# Altium PCB Luchador R3.0 32CH BB.PcbDoc
Units mil, origin at the board's own origin, x right, y up, seen from the top; angles counter-clockwise.
Board outline 3681 x 2951 mil, 4 copper layers (Top Layer, GND PLANE, Signal Layer 1, Bottom Layer), stack 61.634 mil thick; 35 components, 55 nets, 110 pads, 33 vias.
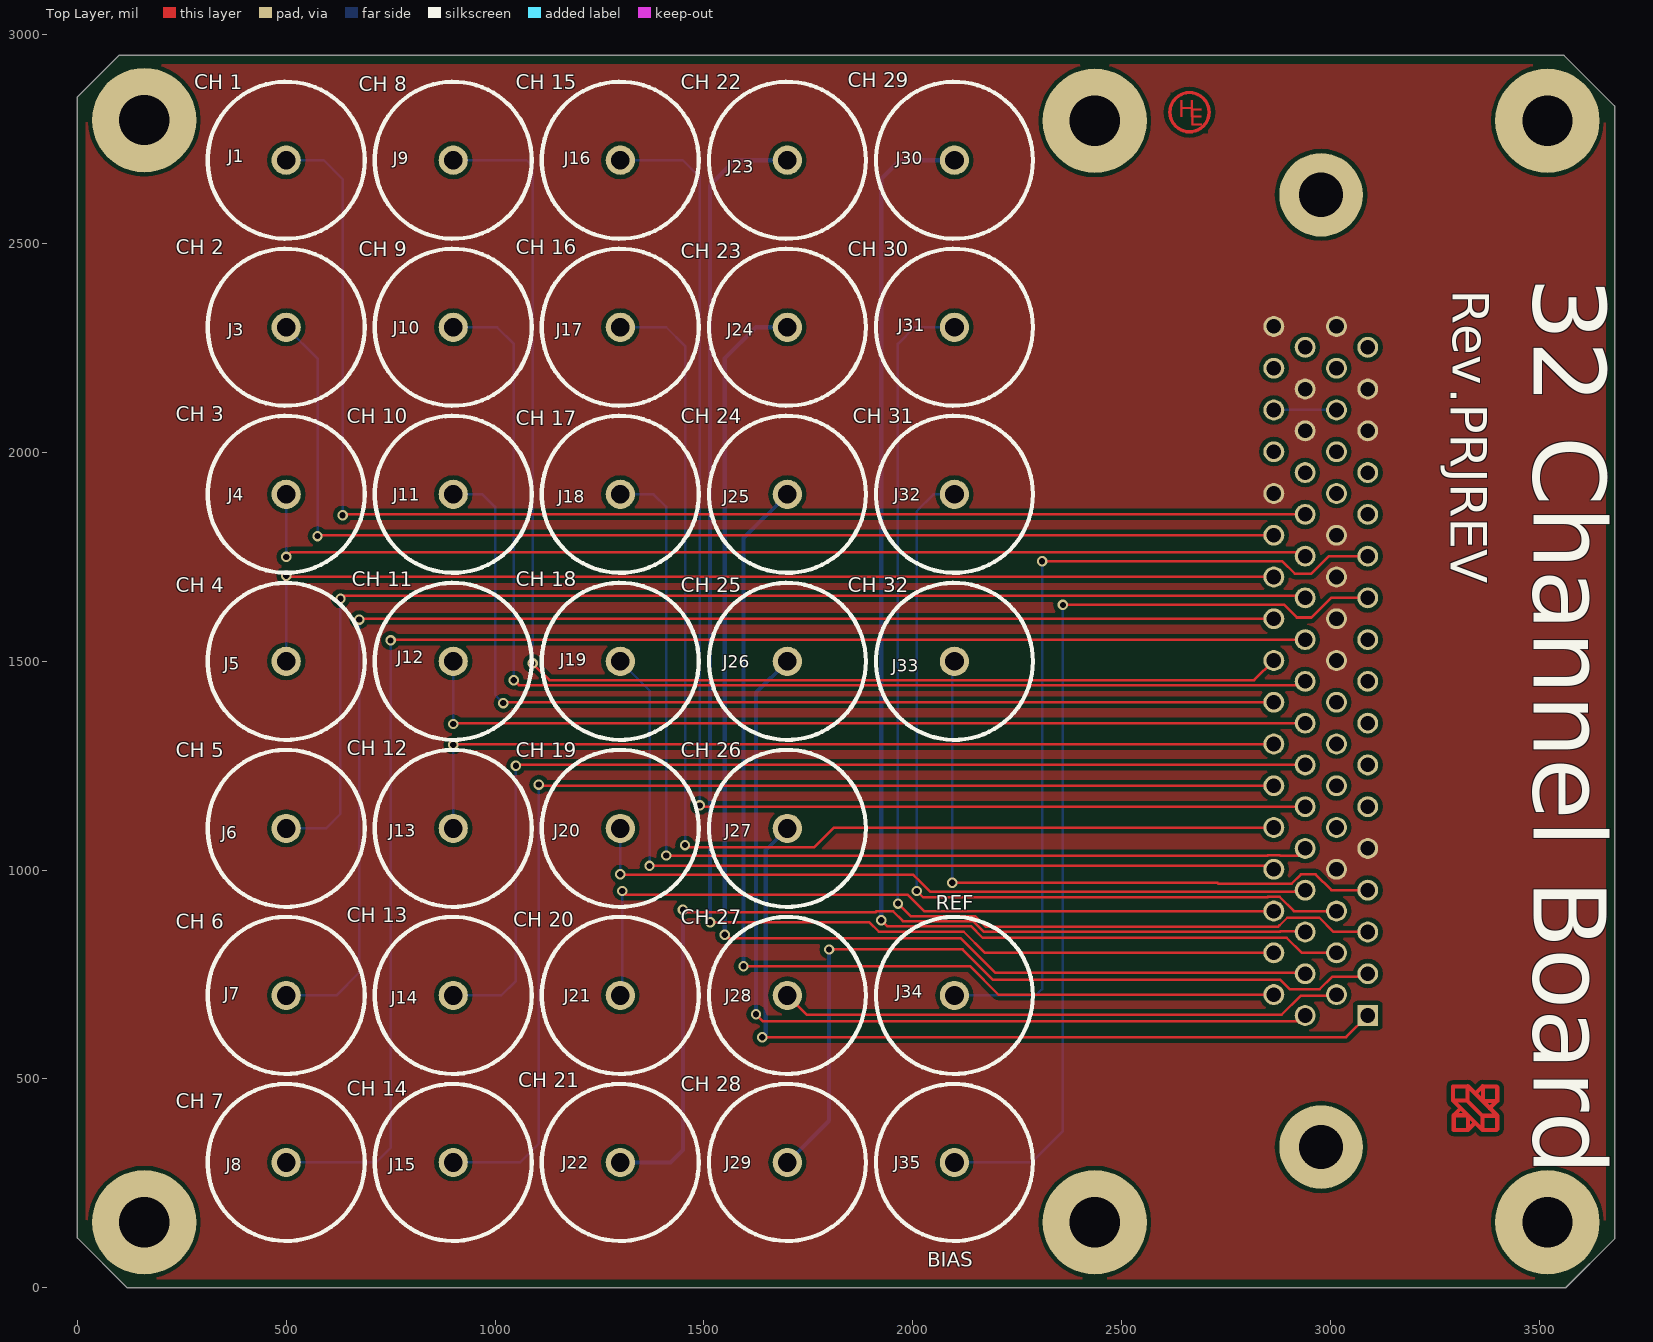
[diagram p0: Top Layer view]
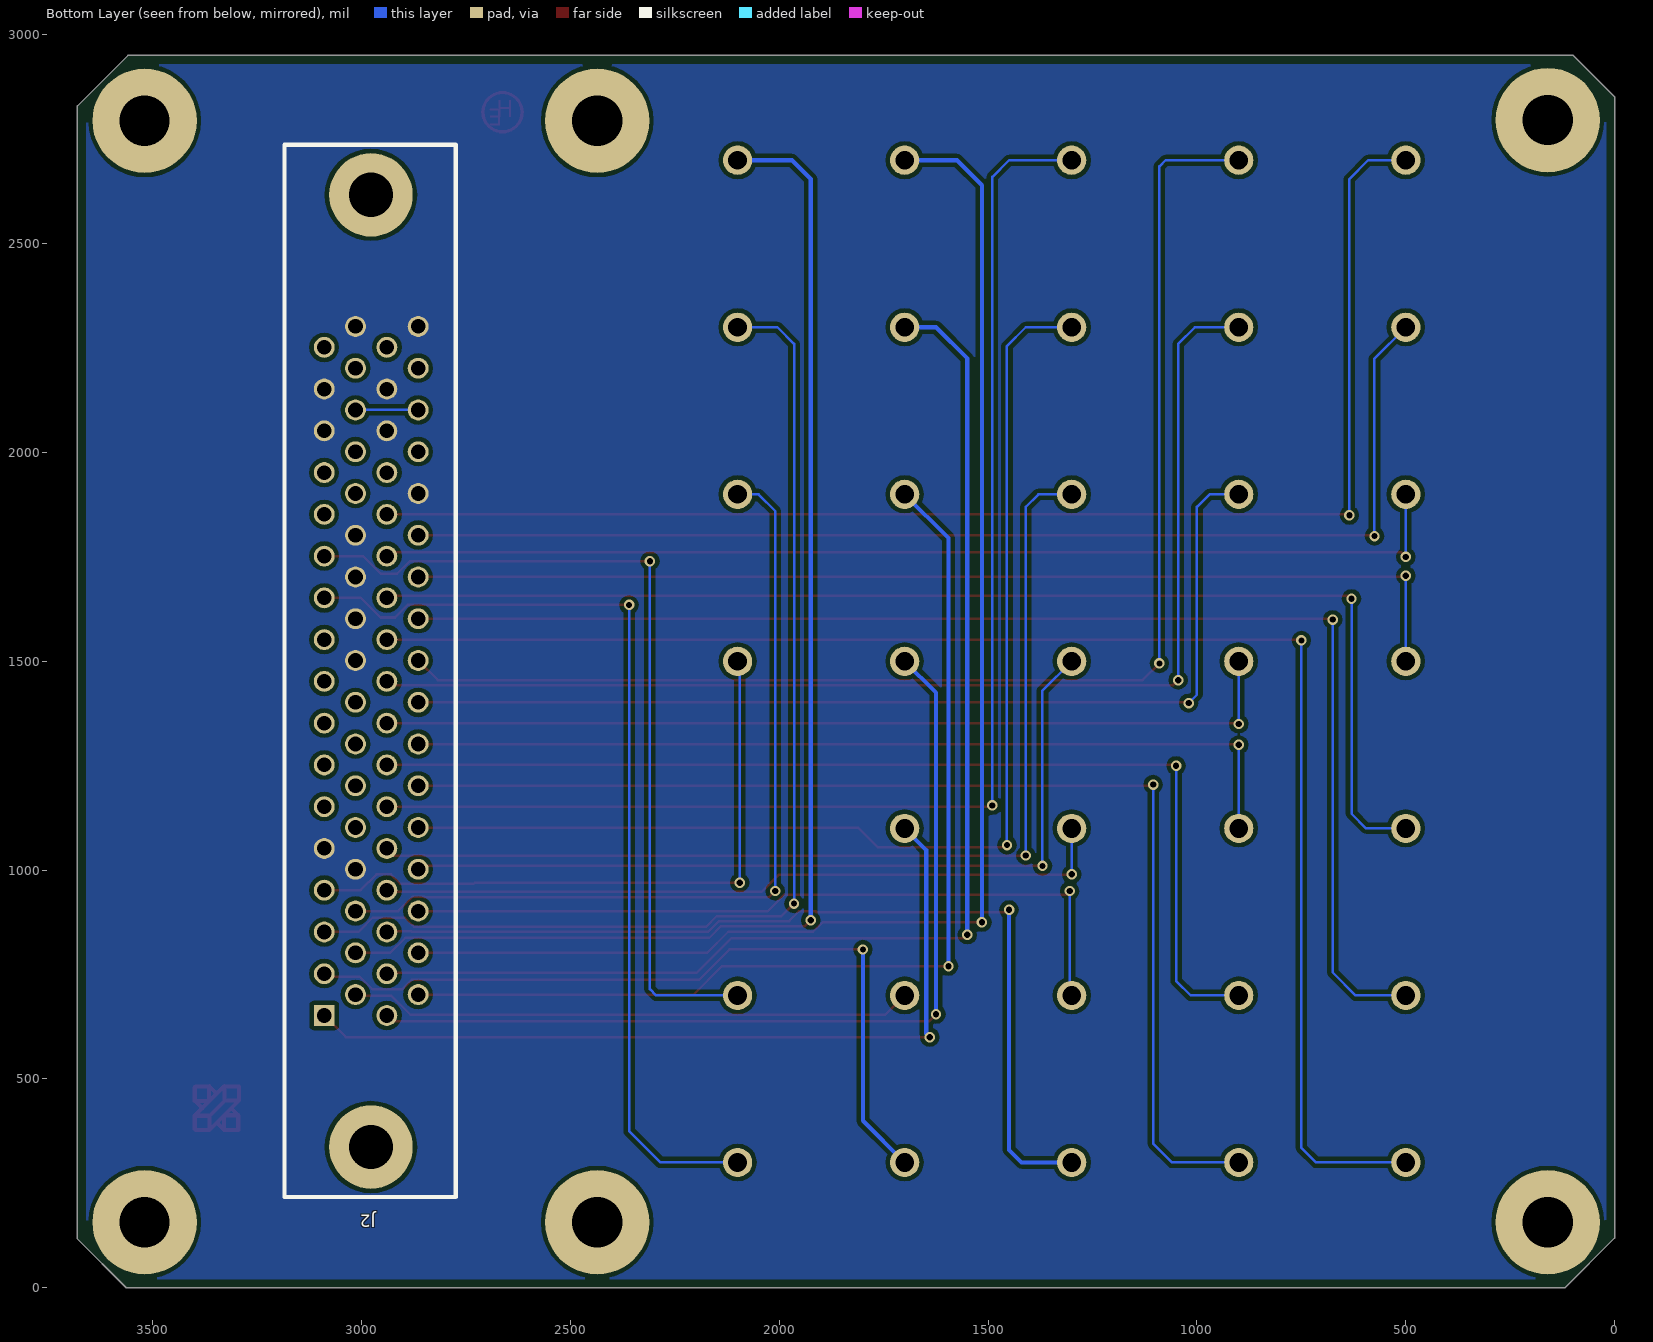
[diagram p1: Bottom Layer view, seen from below]
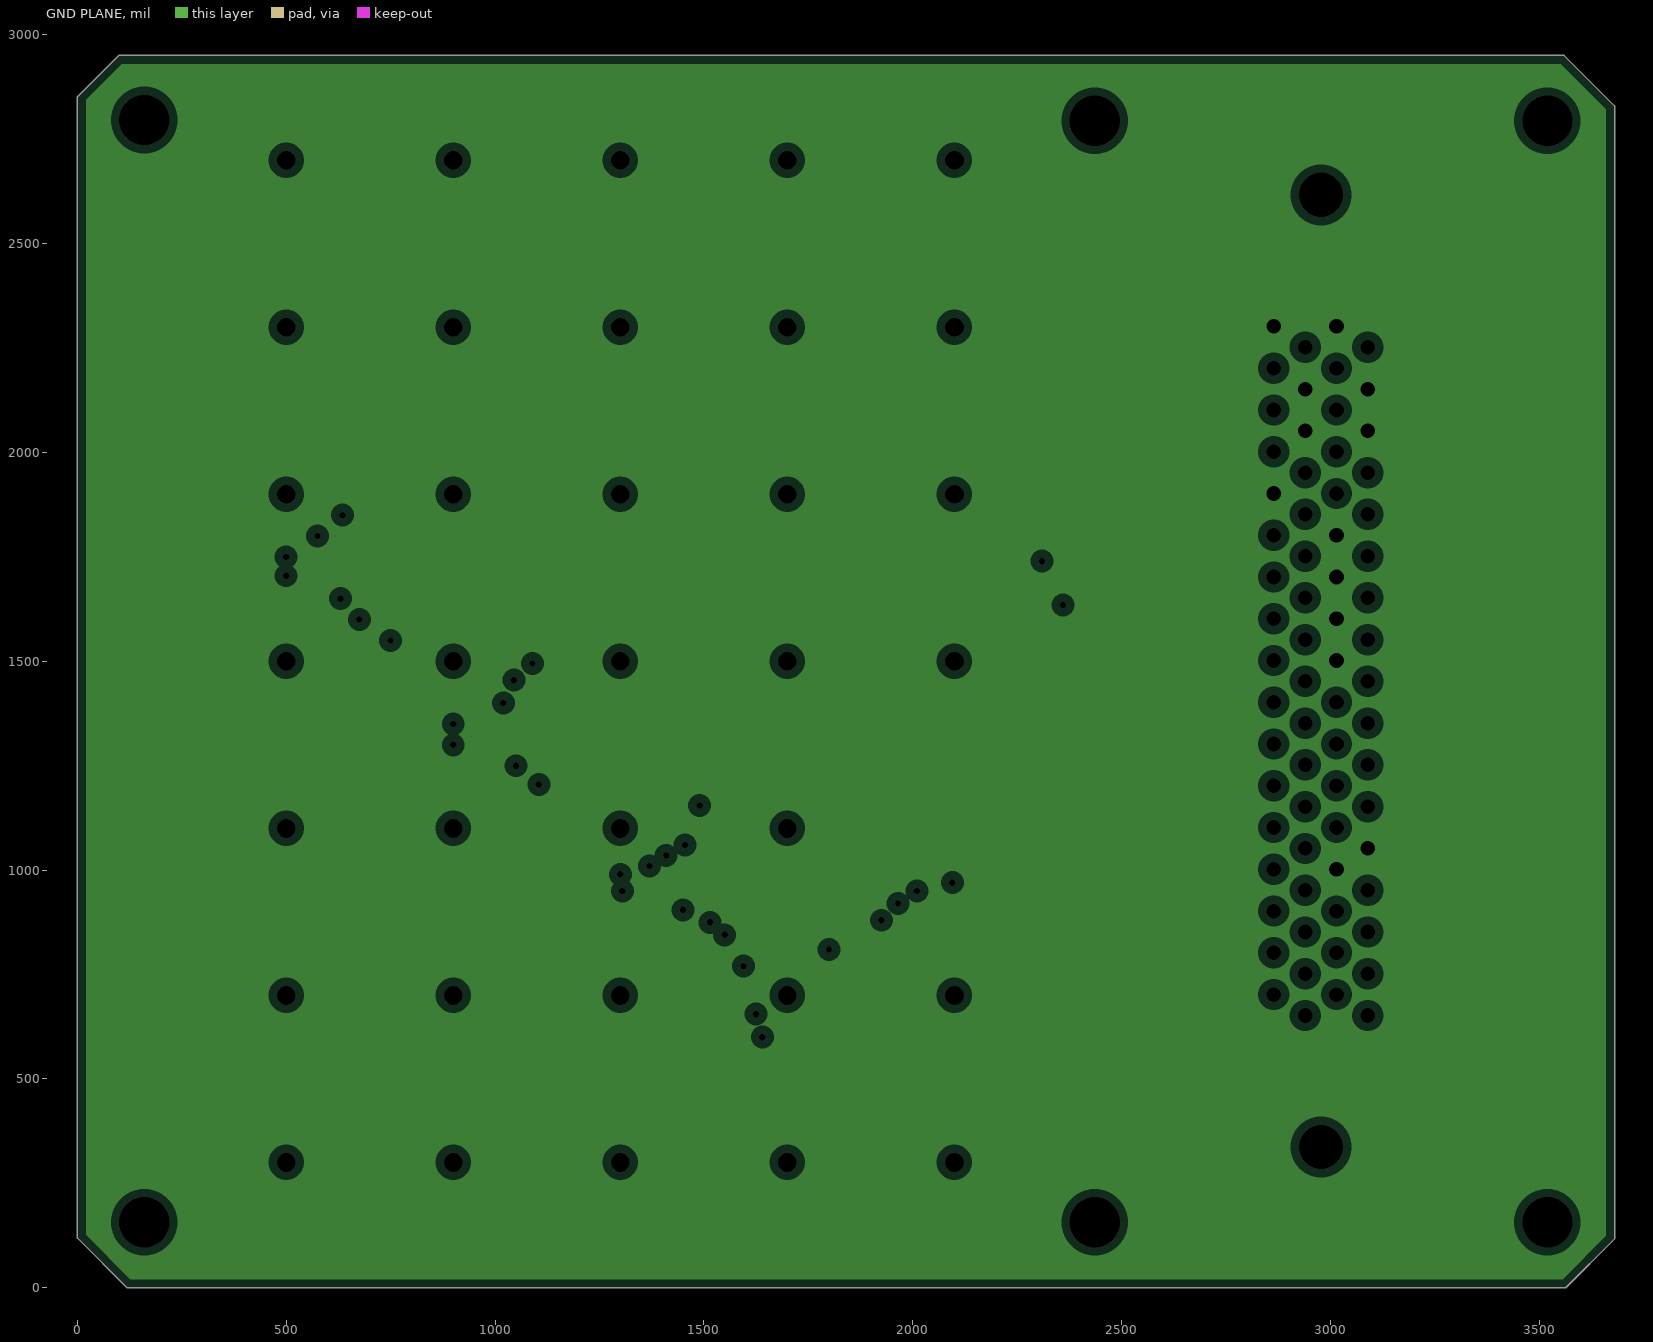
[diagram p2: GND PLANE, clearances drawn from the general rule]
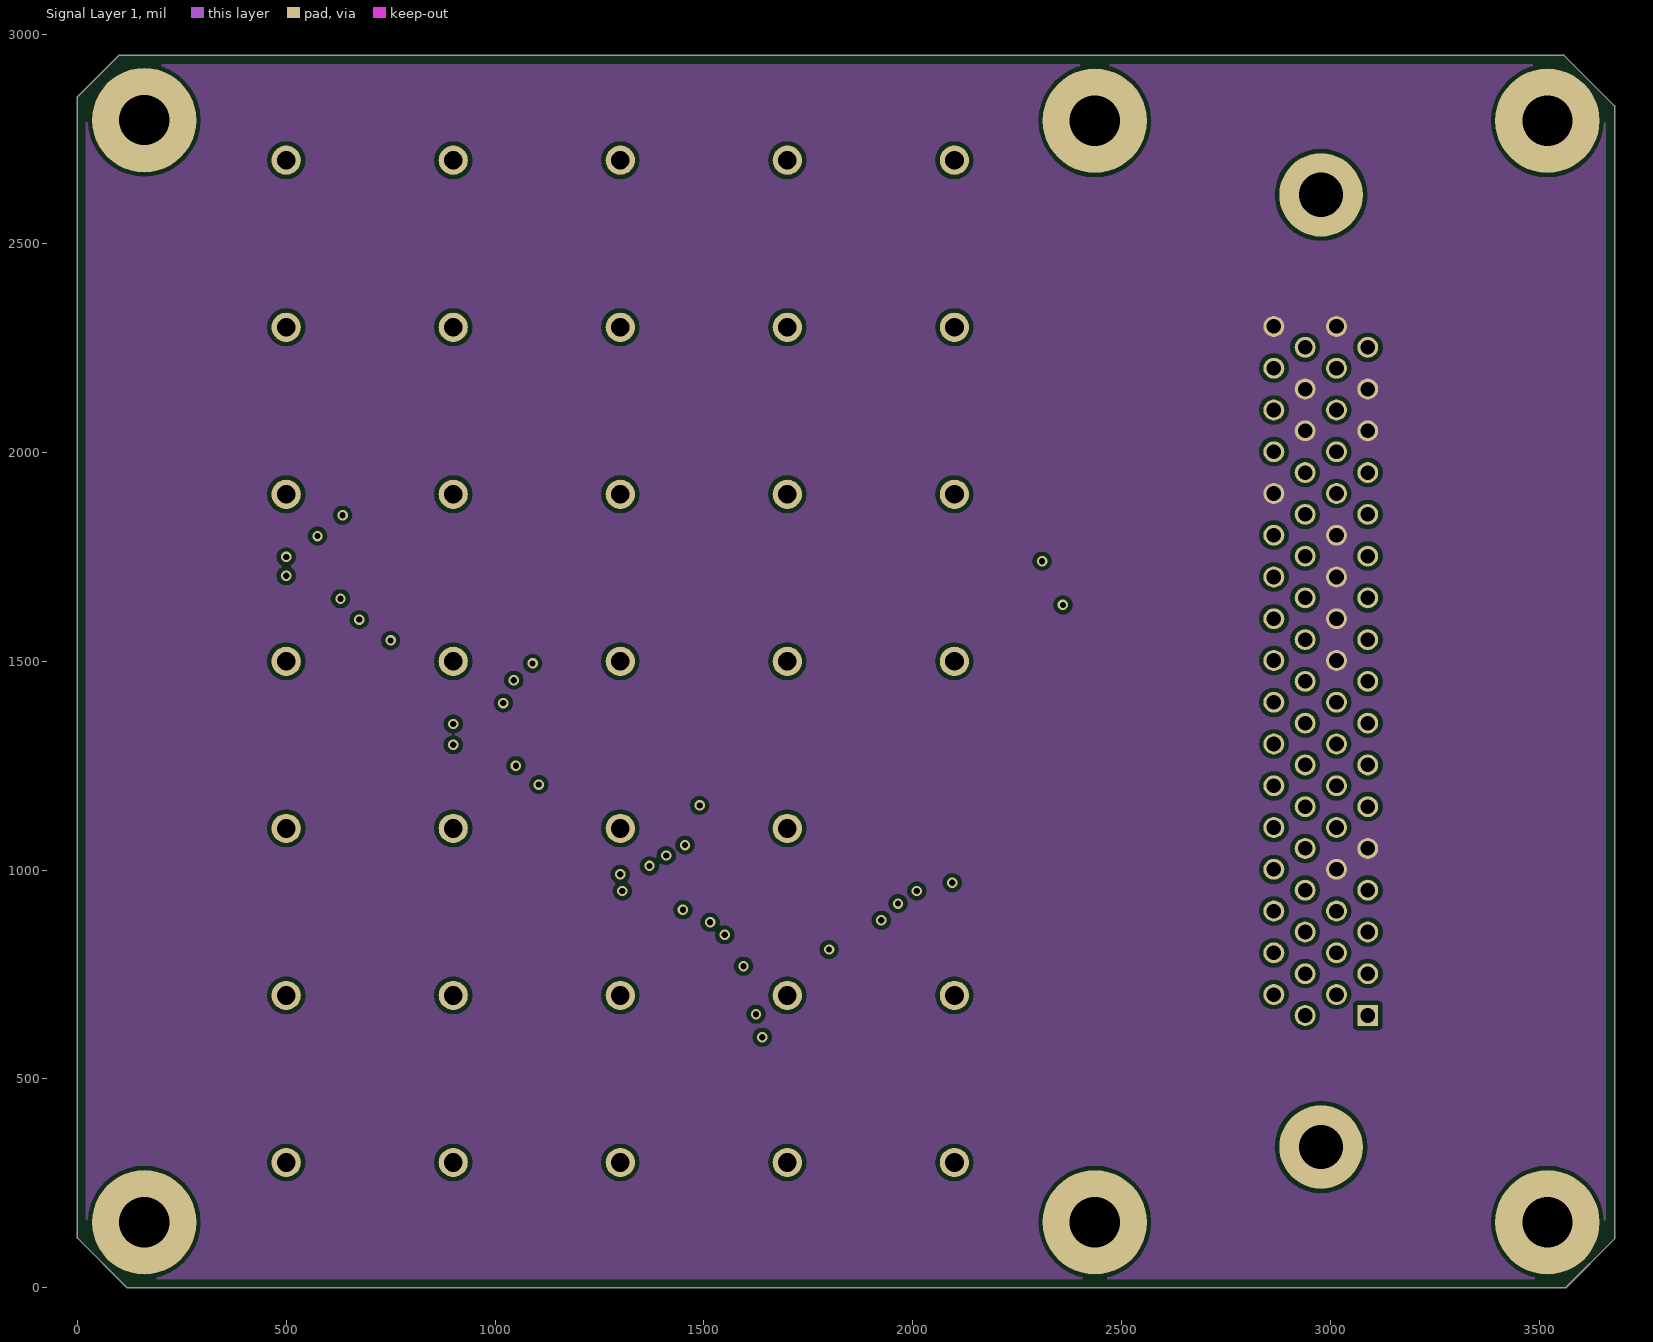
[diagram p3: Signal Layer 1]

## Layer stack, top to bottom
Top Solder: solder mask 0.4, Solder Resist, Dk 3.5
Top Layer: signal copper 1.4
Dielectric 1: core 10, FR-4, Dk 4.2
GND PLANE: plane copper 1.417, net GND
Dielectric 3: prepreg 36, Dk 4.2
Signal Layer 1: signal copper 1.417
Dielectric 2: core 10, Dk 4.2
Bottom Layer: signal copper 1.4
Bottom Solder: solder mask 0.4, Solder Resist, Dk 3.5

## Board outline
0,119 0,2852 99,2951 3560,2951 3681,2830 3681,117 3564,0 119,0

## Design rules (kind name [scope] priority, off if disabled: settings)
Clearance Clearance_1 [InNamedPolygon('TOP GND') Or  InNamedPolygon('SL1 GND') Or  InNamedPolygon('BOT GND')] p1: gap=10 ignorepadtopadclearanceinfootprint=FALSE except(0: Arc-Hole Track-Hole SMDPad-Hole THPad-Hole Via-Hole Fill-Hole Poly-Hole Region-Hole Text-Hole)
Clearance [All] p2: gap=6 ignorepadtopadclearanceinfootprint=FALSE
ComponentClearance [All] p1 off: gap=10 collisioncheckmode=3 verticalgap=10 showdistances=FALSE
PlaneClearance [All] p1: clearance=20
PlaneConnect [All] p1: planeconnectstyle=Direct reliefexpansion=20 reliefentries=4 reliefconductorwidth=10 reliefairgap=10
PolygonConnect PolygonConnect_1 [All vs IsNamedPolygon('TOP GND') Or  IsNamedPolygon('SL1 GND') Or  IsNamedPolygon('BOT GND')] p1: connectstyle=Direct reliefconductorwidth=10 reliefentries=4 polygonreliefangle="90 Angle" airgapwidth=10
PolygonConnect [All] p2: connectstyle=Relief reliefconductorwidth=10 reliefentries=4 polygonreliefangle="90 Angle" airgapwidth=10
RoutingVias [All] p1: holewidth=15 width=25 viastyle="Through Hole" minholewidth=15 minwidth=25 maxholewidth=28 maxwidth=50
SolderMaskExpansion [All] p1: expansion=4
Width [All] p1: maxlimit=100 minlimit=6 preferedwidth=10
27 further rules are at their usual default settings.

## Components (designator, comment, footprint, x,y, rotation, side; value= is the part's Value field where it differs from the comment)
J1 "CH 1" DIN42082-RED 500,2700 r0 top
J2 "10268-6212PC" 2-5174339-5 2865,702 r90 bottom
J3 "CH 2" DIN42082-RED 500,2300 r0 top
J4 "CH 3" DIN42082-RED 500,1900 r0 top
J5 "CH 4" DIN42082-RED 500,1500 r0 top
J6 "CH 5" DIN42082-RED 500,1100 r0 top
J7 "CH 6" DIN42082-RED 500,700 r0 top
J8 "CH 7" DIN42082-RED 500,300 r0 top
J9 "CH 8" DIN42082-RED 900,2700 r0 top
J10 "CH 9" DIN42082-RED 900,2300 r0 top
J11 "CH 10" DIN42082-RED 900,1900 r0 top
J12 "CH 11" DIN42082-RED 900,1500 r0 top
J13 "CH 12" DIN42082-RED 900,1100 r0 top
J14 "CH 13" DIN42082-RED 900,700 r0 top
J15 "CH 14" DIN42082-RED 900,300 r0 top
J16 "CH 15" DIN42082-RED 1300,2700 r0 top
J17 "CH 16" DIN42082-RED 1300,2300 r0 top
J18 "CH 17" DIN42082-RED 1300,1900 r0 top
J19 "CH 18" DIN42082-RED 1300,1500 r0 top
J20 "CH 19" DIN42082-RED 1300,1100 r0 top
J21 "CH 20" DIN42082-RED 1300,700 r0 top
J22 "CH 21" DIN42082-RED 1300,300 r0 top
J23 "CH 22" DIN42082-RED 1700,2700 r0 top
J24 "CH 23" DIN42082-RED 1700,2300 r0 top
J25 "CH 24" DIN42082-RED 1700,1900 r0 top
J26 "CH 25" DIN42082-RED 1700,1500 r0 top
J27 "CH 26" DIN42082-RED 1700,1100 r0 top
J28 "CH 27" DIN42082-RED 1700,700 r0 top
J29 "CH 28" DIN42082-RED 1700,300 r0 top
J30 "CH 29" DIN42082-RED 2100,2700 r0 top
J31 "CH 30" DIN42082-RED 2100,2300 r0 top
J32 "CH 31" DIN42082-RED 2100,1900 r0 top
J33 "CH 32" DIN42082-RED 2100,1500 r0 top
J34 "REF" DIN42082-BLACK 2100,700 r0 top
J35 "BIAS" DIN42082-BLACK 2100,300 r0 top

## Footprints (in the part's own frame and the unit in brackets; to place one, negate y for a bottom-side part, rotate by r counter-clockwise, add the part's x,y. Pads: shape width x height; smd on the part's side, far side on the other; paste and mask are expansions set on the pad)
2-5174339-5 [mil]
  rect 50x50 hole 35: 1(-50,225)
  round 50 hole 35: 2(0,150) 3(50,225) 4(100,150) 5(150,225) 6(200,150) 7(250,225) 8(300,150) 9(350,225) 10(400,150) 11(450,225) 12(500,150) 13(550,225) 14(600,150) 15(650,225) 16(700,150) 17(750,225) 18(800,150) 19(850,225) 20(900,150) 21(950,225) 22(1000,150) 23(1050,225) 24(1100,150) 25(1150,225) 26(1200,150) 27(1250,225) 28(1300,150) 29(1350,225) 30(1400,150) 31(1450,225) 32(1500,150) 33(1550,225) 34(1600,150) 35(-50,75) 36(0,0) 37(50,75) 38(100,0) 39(150,75) 40(200,0) 41(250,75) 42(300,0) 43(350,75) 44(400,0) 45(450,75) 46(500,0) 47(550,75) 48(600,0) 49(650,75) 50(700,0) 51(750,75) 52(800,0) 53(850,75) 54(900,0) 55(950,75) 56(1000,0) 57(1050,75) 58(1100,0) 59(1150,75) 60(1200,0) 61(1250,75) 62(1300,0) 63(1350,75) 64(1400,0) 65(1450,75) 66(1500,0) 67(1550,75) 68(1600,0)
  round 200 hole 106.3: SH(-365,113) SH(1915,113)
  silkscreen extent -485,-90 2035,320, body extent -483,-90 2033,316, height 367
DIN42082-BLACK [mil]
  round 70 hole 45: 1(0,0)
  silkscreen extent -188,-188 188,188, body extent -187,-187 187,187, height 592
DIN42082-RED [mil]
  round 70 hole 45: 1(0,0)
  silkscreen extent -188,-188 188,188, body extent -187,-187 187,187, height 592

## Part data
J1 J3 J4 J5 J6 J7 J8 J9 J10 J11 J12 J13 J14 J15 J16 J17 J18 J19 J20 J21 J22 J23 J24 J25 J26 J27 J28 J29 J30 J31 J32 J33: library part 36880-RED, Manufacturer=PLASTIC1, Manufacturer Part Number=36880, ComponentLink1Description=http://www.molex.com/pdm_docs/sd/039301021_sd.pdf, ComponentLink1URL=http://www.molex.com/pdm_docs/sd/039301021_sd.pdf, Description1="DIN 42-802 PCB JACK, RED", Supplier 1=PLASTIC1, Supplier Part Number 1=36880
J2: Color=Black, Current Rating=1A, Manufacturer="TE Connectivity", Manufacturer Part Number=2-5174339-5, Operating Temperature="-55°C ~ 85°C", Standard Package=420, Supplier Part Number 1=A121355-ND, Voltage Rating=100V, 3D Model=2-5174339-5.pdf, Category="Connectors, Interconnects", Connector Style=D-Type, Connector Type="Cap, Male Pins", Contact Finish=Gold, Contact Finish Thickness="30µin (0.76µm)", Contact Type=Signal, Description1="TE CONNECTIVITY / AMP         2-5174339-5             Standard D Sub Connector, Vertical, AMPLIMITE 0.050 Series, Plug, 68 Contacts, Steel Body", Family="D-Sub Connectors", Features=Shielded, Flange Feature="Housing/Shell (M2.5)", Housing Material="Polybutylene Terephthalate (PBT)", Mounting Type="Through Hole", Number of Positions=68, Number of Rows=2, Pricing 1="1=20.4, 10=18.414, 25=17.6424, 50=16.5398, 100=15.9885, 250=15.1064, 500=14.6653 (USD)", RoHS Information="2-5174339-5 Statement of Compliance", Series="AMPLIMITE .050 II", Shell Material, Finish="Zinc, Nickel Plated", Shell Size, Connector Layout="0.050 Pitch x 0.100 Row to Row", Stock 1=1867, Supplier 1=Digi-Key, Termination=Solder
J34 J35: library part 36880-BLACK, Manufacturer=PLASTIC1, ComponentLink1Description=http://www.molex.com/pdm_docs/sd/039301021_sd.pdf, ComponentLink1URL=http://www.molex.com/pdm_docs/sd/039301021_sd.pdf, Description1="DIN 42-802 PCB JACK, BLACK", Manufacturer Part Number=36880-BLACK, Supplier 1=PLASTIC1, Supplier Part Number 1=36880-BLACK

## Free pads (board coordinates)
  round 250 hole 120: M(160,156.73) M(160,2796) M(2436.26,156.73) M(2436.26,2794.53) M(3519.92,156.73) M(3519.92,2794.53)

## Via types
v1: diameter 25, hole 15, Top Layer to Bottom Layer, tented both sides, 33 vias

## Nets (pads, with @x,y where several pads share a name; then routed paths per layer and width w, separated by ;. In a path a pad name is that pad's centre, name@x,y a point inside that pad or via, vN(x,y) a via of type N, cw(c..) or ccw(c..) an arc to the next point about the centre after c; other vN are vias at no path point)
+2.5V: J2.25
+3.3V: J2.27
+VSYS: J2.28
-2.5V: J2.26
AUX0: J2.32
AUX1: J2.66
AUX2: J2.61
AUX3: J2.62
BIAS: J2.21 J35.1 | length 2313.8
  Top Layer w6: v1(2360,1635) 2361,1636 2889,1636 2920,1605 2955,1605 3002,1652 J2.21
  Bottom Layer w6: J35.1 2285,300 2360,375 v1(2360,1635)
CH1: J1.1 J2.59 | length 3264.5
  Top Layer w6: v1(635,1850) 637,1852 J2.59
  Bottom Layer w6: J1.1 590,2700 635,2655 v1(635,1850)
CH2: J2.58 J3.1 | length 2821.9
  Top Layer w6: v1(575,1800) 577,1802 J2.58
  Bottom Layer w6: J3.1 575,2225 v1(575,1800)
CH3: J2.57 J4.1 | length 2598.7
  Top Layer w6: v1(500,1750) 511.5,1761.5 2930.5,1761.5 J2.57
  Bottom Layer w6: v1(500,1750) J4.1
CH4: J2.56 J5.1 | length 2571.2
  Top Layer w6: v1(500,1705) 503,1702 J2.56
  Bottom Layer w6: J5.1 v1(500,1705)
CH5: J2.55 J6.1 | length 2974.1
  Top Layer w6: v1(630,1650) 636.5,1656.5 2935.5,1656.5 J2.55
  Bottom Layer w6: J6.1 595,1100 630,1135 v1(630,1650)
CH6: J2.54 J7.1 | length 3233.6
  Top Layer w6: v1(675,1600) 677,1602 J2.54
  Bottom Layer w6: J7.1 620,700 675,755 v1(675,1600)
CH7: J2.53 J8.1 | length 3670.3
  Top Layer w6: v1(750,1550) 752,1552 J2.53
  Bottom Layer w6: J8.1 715,300 750,335 v1(750,1550)
CH8: J2.52 J9.1 | length 3197.2
  Top Layer w6: v1(1090,1495) 1130,1455 2818,1455 J2.52
  Bottom Layer w6: J9.1 1075,2700 1090,2685 v1(1090,1495)
CH9: J2.51 J10.1 | length 2870.3
  Top Layer w6: v1(1045,1455) 1057,1443 2931,1443 J2.51
  Bottom Layer w6: J10.1 1005,2300 1045,2260 v1(1045,1455)
CH10: J2.50 J11.1 | length 2436.5
  Top Layer w6: v1(1020,1400) 1022,1402 J2.50
  Bottom Layer w6: J11.1 970,1900 1000,1870 1000,1420 v1(1020,1400)
CH11: J2.49 J12.1 | length 2190.8
  Top Layer w6: v1(900,1350) 902,1352 J2.49
  Bottom Layer w6: v1(900,1350) J12.1
CH12: J2.48 J13.1 | length 2165.8
  Top Layer w6: v1(900,1300) 902,1302 J2.48
  Bottom Layer w6: J13.1 v1(900,1300)
CH13: J2.47 J14.1 | length 2570.3
  Top Layer w6: v1(1050,1250) 1052,1252 J2.47
  Bottom Layer w6: J14.1 1015,700 1050,735 v1(1050,1250)
CH14: J2.46 J15.1 | length 2844.9
  Top Layer w6: v1(1105,1205) 1108,1202 J2.46
  Bottom Layer w6: J15.1 1060,300 1105,345 v1(1105,1205)
CH15: J2.45 J16.1 | length 3162.8
  Top Layer w6: v1(1490,1155) 1493,1152 J2.45
  Bottom Layer w6: J16.1 1450,2700 1490,2660 v1(1490,1155)
CH16: J2.44 J17.1 | length 2800.2
  Top Layer w6: v1(1455,1060) 1460,1055 1765,1055 1812,1102 J2.44
  Bottom Layer w6: J17.1 1410,2300 1455,2255 v1(1455,1060)
CH17: J2.43 J18.1 | length 2495.3
  Top Layer w6: v1(1410,1035) 2849.92,1035 2850.92,1036 2879.08,1036 2880.08,1035 2923,1035 J2.43
  Bottom Layer w6: J18.1 1380,1900 1410,1870 v1(1410,1035)
CH18: J2.42 J19.1 | length 2017.3
  Top Layer w6: v1(1370,1010) 2857,1010 J2.42
  Bottom Layer w6: J19.1 1370,1430 v1(1370,1010)
CH19: J2.41 J20.1 | length 1768.6
  Top Layer w6: v1(1300,990) 1301.5,988.5 2001.91,988.5 2041.91,948.5 2936.5,948.5 J2.41
  Bottom Layer w6: v1(1300,990) J20.1
CH20: J2.40 J21.1 | length 1832
  Top Layer w6: v1(1305,950) 1313.5,941.5 1988.09,941.5 2027.59,902 J2.40
  Bottom Layer w6: J21.1 1305,705 v1(1305,950)
CH21: J2.39 J22.1 | length 2252.3
  Top Layer w6: v1(1450,905) 1456,899 1910.77,899 1913.27,901.5 1953.09,901.5 1976.59,878 2145.03,878 2170.03,853 2879.97,853 2880.97,854 2938,854 J2.39
  Bottom Layer w10: J22.1 1420,300 1450,330 v1(1450,905)
CH22: J2.38 J23.1 | length 3355.1
  Top Layer w6: v1(1515,875) 1896.77,875 1919.27,852.5 2122.5,852.5 2173,802 J2.38
  Bottom Layer w10: v1(1515,875) 1515,2640 1575,2700 J23.1
CH23: J2.37 J24.1 | length 2989.6
  Top Layer w6: v1(1550,845) 1558.5,836.5 2115.87,836.5 2198.37,754 2938,754 J2.37
  Bottom Layer w10: v1(1550,845) 1550,2225 1625,2300 J24.1
CH24: J2.36 J25.1 | length 2471.7
  Top Layer w6: v1(1595,770) 2137.12,770 2205.12,702 J2.36
  Bottom Layer w10: v1(1595,770) 1595,1795 J25.1
CH25: J2.35 J26.1 | length 2203.9
  Top Layer w6: v1(1625,655) 1642,638 2926,638 J2.35
  Bottom Layer w10: v1(1625,655) 1625,1425 J26.1
CH25-: J2.10
CH26: J2.1 J27.1 | length 1996.4
  Top Layer w6: v1(1640,600) 3038,600 J2.1
  Bottom Layer w10: v1(1640,600) 1648.5,608.5 1648.5,1048.5 J27.1
CH26-: J2.11
CH27: J2.2 J28.1 | length 1353.9
  Top Layer w6: J28.1 1746,654 2884,654 2929,699 3012,699 J2.2
CH27-: J2.12
CH28: J2.3 J29.1 | length 1896.1
  Top Layer w6: v1(1800,810) 2119.75,810 2191.75,738 2879.91,738 2902.91,715 2975,715 3005,745 3083,745 J2.3
  Bottom Layer w10: J29.1 1800,400 v1(1800,810)
CH28-: J2.13
CH29: J2.4 J30.1 | length 3090.9
  Top Layer w6: v1(1925,880) 1939,866 2140.06,866 2168.06,838 2896,838 2932,802 J2.4
  Bottom Layer w10: v1(1925,880) 1925,2655 1970,2700 J30.1
CH29-: J2.14
CH30: J2.5 J31.1 | length 2662.1
  Top Layer w6: v1(1965,920) 1995,890 2150,890 2175,865 2875,865 2878,868 2879.08,868 2897.08,886 2974,886 3008,852 J2.5
  Bottom Layer w6: v1(1965,920) 1965,2260 2005,2300 J31.1
CH30-: J2.15
CH31: J2.6 J32.1 | length 2042.3
  Top Layer w6: v1(2010,950) 2025,935 2849.92,935 2850.92,936 2879.08,936 2913.08,902 J2.6
  Bottom Layer w6: v1(2010,950) 2010,1860 2050,1900 J32.1
CH31-: J2.16
CH32: J2.7 J33.1 | length 1552.8
  Top Layer w6: v1(2095,970) 2730,970 2732,968 2907.92,968 2929.92,990 2965,990 3003,952 J2.7
  Bottom Layer w6: v1(2095,970) 2095,1495 J33.1
CH32-: J2.17
GND: J2.8 J2.9 J2.18 J2.20 J2.22 J2.24 J2.29 J2.31 J2.34 J2.60 J2.63 J2.65 J2.68
I2C.SCL: J2.33
I2C.SDA: J2.67
REF: J2.23 J34.1 | length 2051
  Top Layer w6: v1(2310,1740) 2885,1740 2915,1710 2955,1710 2997,1752 J2.23
  Bottom Layer w6: J34.1 2295,700 2310,715 v1(2310,1740)
SHIELD: J2.30 J2.64 | length 150
  Bottom Layer w6: J2.64 J2.30
SRB2: J2.19
pads on no net: J2.SH
copper on no net: | length 1179.3
  Top Layer w8: 2710.01,2815 ccw(c2663,2815) 2710.01,2815
  Top Layer w10: 3312,429 3296,413 ; 3327,448 3294,448 ; 3327.5,448.5 3364.5,411.5 ; 3328,413 3296,413 ; 3329,450 3329,482 3294,482 3294,448 ; 3329.5,482.5 3400,412 ; 3330,411 3330,378 ; 3347,395 3330,378 ; 3348,465 3365.5,482.5 ; 3364.5,377.5 3294,448 ; 3382,430 3399.5,447.5 ; 3398,378 3365,378 3365,412 3400,412 ; 3398,482 3366,482 3366,447 3400,447 3400,480 ; 3400,380 3400,412 ; 3296,413 3296,378 3330,378

## Polygon pours and split planes (outlines as drawn)
GND on Top Layer "TOP GND" (solid, remove dead copper, pour order 0): 125,20 3555,20 3660,125 3660,2820 3550,2930 105,2930 20,2845 20,125
GND on Signal Layer 1 "SL1 GND" (solid, remove dead copper, pour order 2): 125,20 3555,20 3660,125 3660,2820 3550,2930 105,2930 20,2845 20,125
GND on Bottom Layer "BOT GND" (solid, remove dead copper, pour order 4): 125,20 3555,20 3660,125 3660,2820 3550,2930 105,2930 20,2845 20,125
GND on GND PLANE (split plane): 3660.9,2821.68 3660.9,125.32 3555.68,20.1 127.32,20.1 20.1,127.32 20.1,2843.68 107.32,2930.9 3551.68,2930.9

## Other copper
Top Layer:
  text "H" at 2636,2803 h40
  text "E" at 2662,2783 h40

## Silkscreen, mask and mechanical layers (free items; w line width, h text height)
Top Overlay:
  text "32 Channel Board" at 3430,2420 h300 r270
  text "Rev" at 3265,2390 h150 r270
  text ".PRJREV" at 3260,2155 h150 r270
Top Solder:
  circle w8: c2663,2815 r47.01
  lines w10: 3312,429 3296,413 ; 3327,448 3294,448 ; 3327.5,448.5 3364.5,411.5 ; 3328,413 3296,413 ; 3329,450 3329,482 3294,482 3294,448 ; 3329.5,482.5 3400,412 ; 3330,411 3330,378 ; 3347,395 3330,378 ; 3348,465 3365.5,482.5 ; 3364.5,377.5 3294,448 ; 3382,430 3399.5,447.5 ; 3398,378 3365,378 3365,412 3400,412 ; 3398,482 3366,482 3366,447 3400,447 3400,480 ; 3400,380 3400,412 ; 3296,413 3296,378 3330,378
  text "H" at 2636,2803 h40
  text "E" at 2662,2783 h40
Board Outline:
  lines w10: 0,119 0,151 0,2852 99,2951 3153,2951 3560,2951 3681,2830 3681,117 3564,0 1951,0 119,0 0,119
Dims:
  lines w10: -85,0 135,0 ; 0,-90 0,135
Notes:
  lines w10: 4273,1213 8523,1213 ; 4273,1613 8523,1613 ; 4273,1863 8523,1863 ; 4273,13 8523,13 8523,2063 8473,2113 4322,2113 4273,2064 4273,13
  text "FABRICATION NOTES" at 5607,3976 h150
  text "1.  PCB SUBSTRATE MATERIAL:  FR4" at 4307,3576 h150
  text "2.  FINISHED THICKNESS SHALL BE 62 MIL" at 4307,3376 h150
  text "3.  HOLE DIMENSIONS TO APPLY AFTER PLATING" at 4307,3176 h150
  text "4.  COPPER WEIGHT: 1 OZ" at 4307,2976 h150
  text "5.  SILKSCREEN COLOR: WHITE" at 4307,2776 h150
  text "6.  SOLDER MASK: BLACK" at 4307,2576 h150
  text "Designer:" at 4373,1963 h80
  text "Nick Haman" at 5123,1963 h80
  text "Date:" at 6673,1963 h80
  text "'.PRJDATE'" at 7173,1963 h80
  text "PCB Engineer:" at 4373,1713 h80
  text "Nick Haman" at 5423,1713 h80
  text "Layer:" at 6586,1712 h80
  text "Project Name:" at 4373,1463 h80
  text "LUCHADOR" at 5423,1463 h80
  text "Page:" at 7041,1345 h80
  text "of" at 7769,1345 h80
  text "XX" at 8035,1345 h80
  text "PCB #:" at 4373,1313 h80
  text "---" at 4923,1313 h80
  text "Rev:" at 6073,1313 h80
  text ".PRJREV" at 6447,1312 h80
  text "Contact Info:" at 4373,1063 h80
  text "HAMAN ENGINEERING" at 4374,746 h100
  text "626.319.1192" at 4383,588 h80
  text "nick@hamaneng.com" at 4383,438 h80
  text "WWW.HAMANENG.COM" at 4374,251 h100